# Altium PCB PCB_bp_rpi_lcnc-v0.355_2024-03-14.pcbdoc
Units mm, origin at the board's own origin, x right, y up, seen from the top; angles counter-clockwise.
Board outline 116.27 x 85.37 mm, 2 copper layers (Top Layer, Bottom Layer); 28 components, 92 nets, 233 pads, 17 vias.
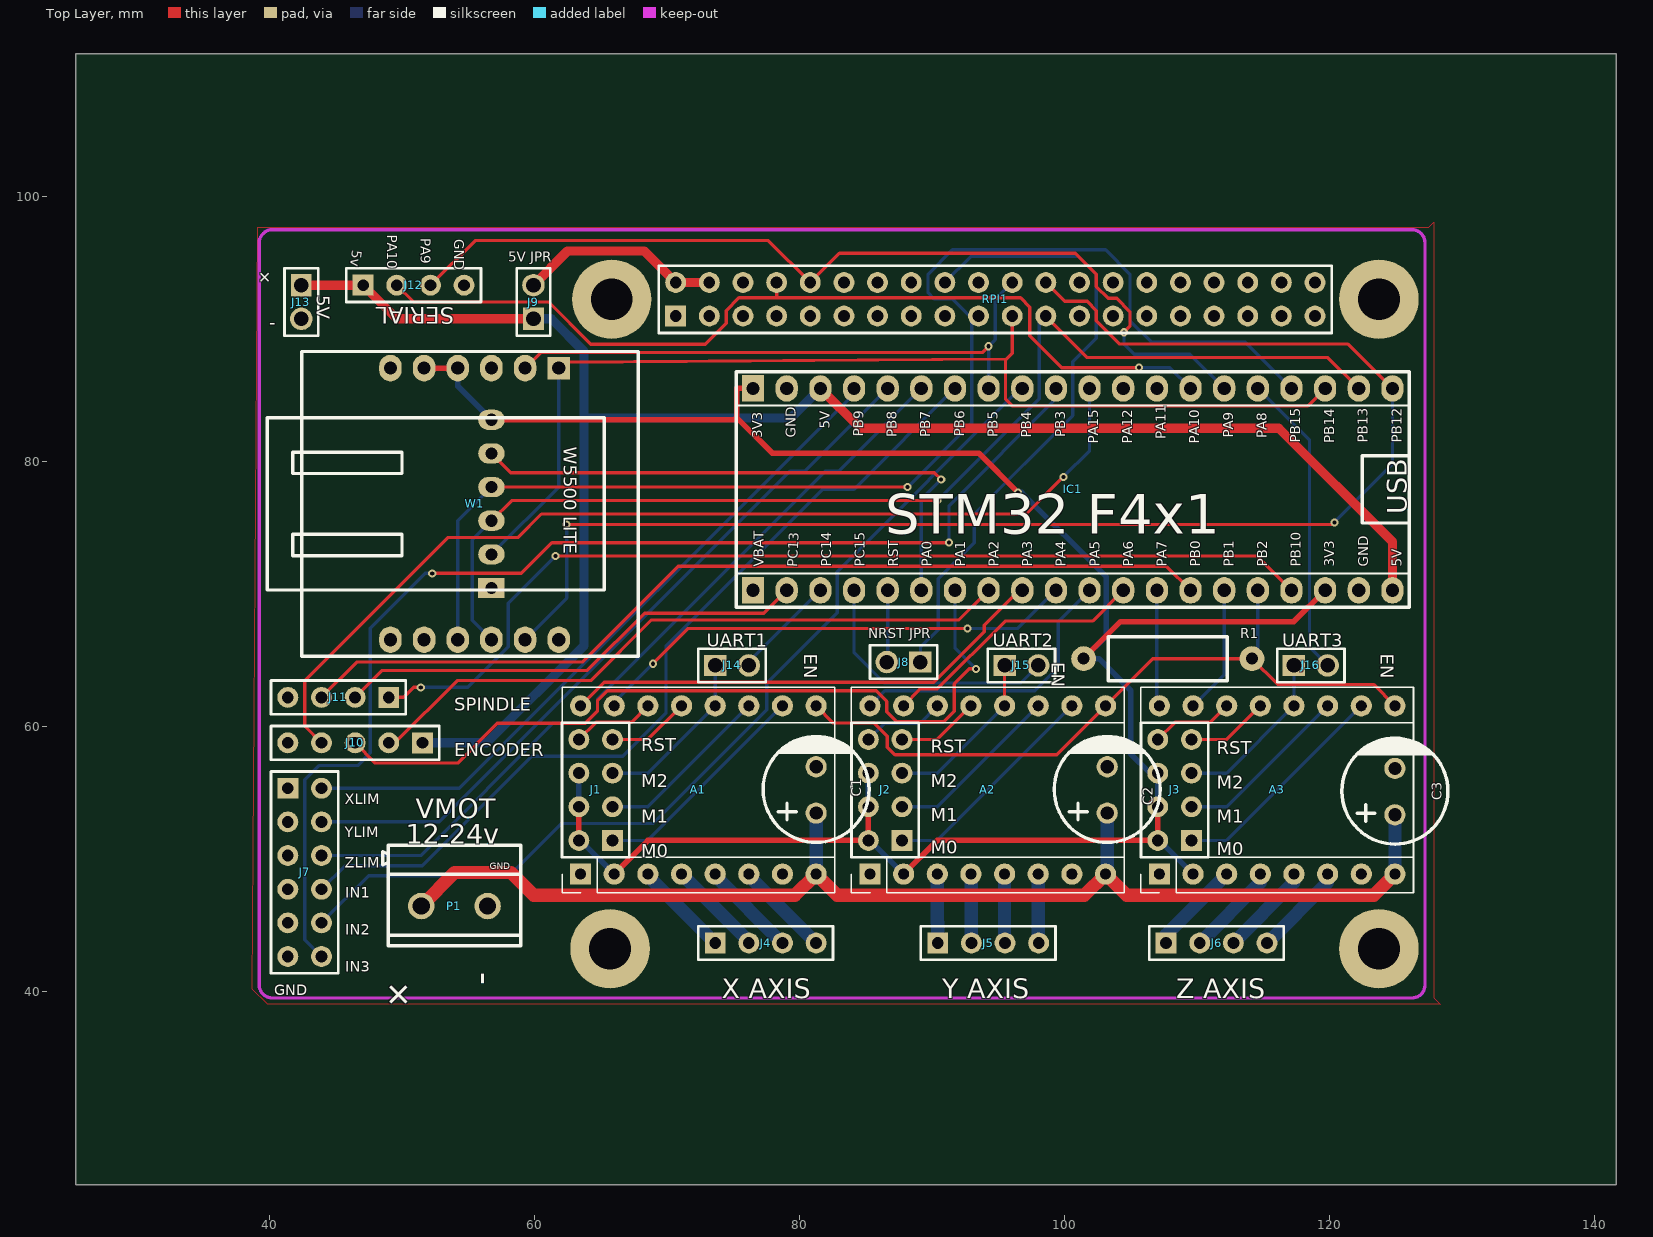
[diagram p0: Top Layer view]
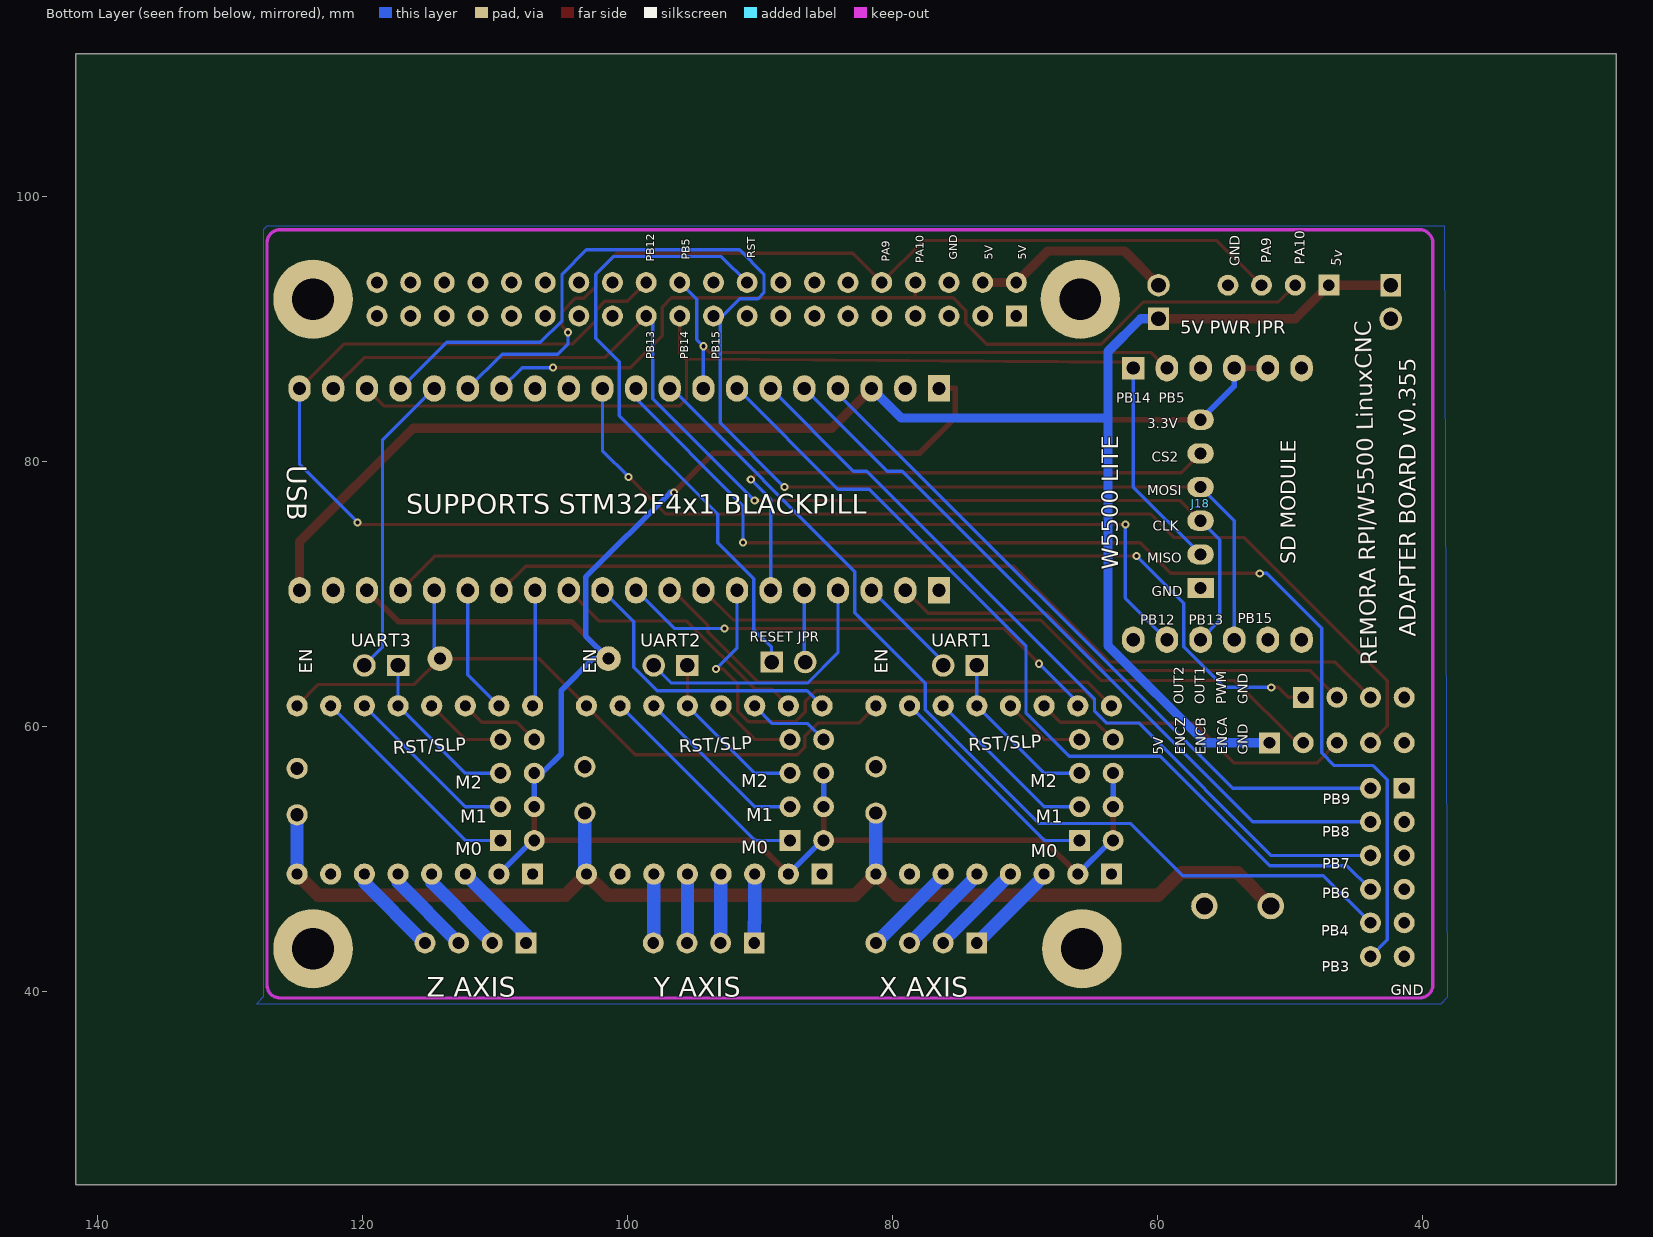
[diagram p1: Bottom Layer view, seen from below]

## Layer stack, top to bottom
Top Layer: signal copper (thickness not stored)
Dielectric: dielectric 0.32, FR-4, Dk 4.8
Bottom Layer: signal copper (thickness not stored)

## Board outline
141.668,25.4 25.4,25.4 25.4,110.771 141.668,110.771

## Components (designator, comment, footprint, x,y, rotation, side; value= is the part's Value field where it differs from the comment)
A1 "Pololu_Breakout_DRV8825" POLOLU_BREAKOUT-16_15.2X20.3MM 72.39,55.209 r90 top
A2 "Pololu_Breakout_DRV8825" POLOLU_BREAKOUT-16_15.2X20.3MM 94.234,55.209 r90 top
A3 "Pololu_Breakout_DRV8825" POLOLU_BREAKOUT-16_15.2X20.3MM 116.078,55.209 r90 top
C1 "100u" CAP-D8.0×F3.5 81.28,55.209 r90 top
C2 "100u" CAP-D8.0×F3.5 103.251,55.209 r90 top
C3 "100u" CAP-D8.0×F3.5 124.968,55.082 r90 top
IC1 "WEACT F411CE BLACK PILL" "BLACKPILL F411" 99.38,77.895 r270 top
J1 "HDR-M-2.54_2x4" HDR-M-2.54_2X4 64.643,55.209 r90 top
J2 "HDR-M-2.54_2x4" HDR-M-2.54_2X4 86.495,55.209 r90 top
J3 "HDR-M-2.54_2x4" HDR-M-2.54_2X4 108.339,55.209 r90 top
J4 "HDR-M-2.54_1x4" HDR-M-2.54_1X4 77.47,43.652 r0 top
J5 "HDR-M-2.54_1x4" HDR-M-2.54_1X4 94.267,43.652 r0 top
J6 "HDR-M-2.54_1x4" HDR-M-2.54_1X4 111.506,43.652 r0 top
J7 "HDR-M-2.54_2x6" HDR-M-2.54_2X6 42.672,48.986 r270 top
J8 "HDR-M-2.54_1x2" HDR-M-2.54_1X2 87.884,64.861 r180 top
J9 "HDR-M-2.54_1x2" HDR-M-2.54_1X2 59.944,92.039 r90 top
J10 "HDR-M-2.54_1x5" HDR-M-2.54_1X5 46.482,58.765 r180 top
J11 "HDR-M-2.54_1x4" HDR-M-2.54_1X4 45.212,62.194 r180 top
J12 "HDR-M-2.54_1x4" HDR-M-2.54_1X4 50.897,93.309 r0 top
J13 "HDR-M-2.54_1x2" HDR-M-2.54_1X2 42.418,92.039 r270 top
J14 "HDR-M-2.54_1x2" HDR-M-2.54_1X2 74.93,64.607 r0 top
J15 "HDR-M-2.54_1x2" HDR-M-2.54_1X2 96.774,64.607 r0 top
J16 "HDR-M-2.54_1x2" HDR-M-2.54_1X2 118.618,64.607 r0 top
J18 "MICRO SD CARD (MINIPCB) COPY" "MICRO SD CARD (MINIPCB)2" 56.769,76.799 r0 bottom
P1 "CONN-TH_2P-P5.00" CONN-TH_2P-P5.00 53.975,46.446 r0 top
R1 "10k" R_AXIAL-0.5 107.823,65.115 r0 top
RPI1 "RASPBERRY PI 4 B" HDR-20X2/2.54 94.808,92.246 r0 top
W1 "WIZNET5500" COMM-TH_W5500 55.499,76.799 r180 top

## Footprints (in the part's own frame and the unit in brackets; to place one, negate y for a bottom-side part, rotate by r counter-clockwise, add the part's x,y. Pads: shape width x height; smd on the part's side, far side on the other; paste and mask are expansions set on the pad)
"BLACKPILL F411" [mm]
  oval 2x1.676 hole 1 paste+0 mask+0.102: 3V3_1(7.62,20.32) 5V_1(7.62,25.4) 5V_2(-7.62,-17.78) GND_1(7.62,22.86) GND_3(-7.62,-20.32) PA0(7.62,-10.16) PA1(7.62,-7.62) PA2(7.62,-5.08) PA3(7.62,-2.54) PA4(7.62,0) PA5(7.62,2.54) PA6(7.62,5.08) PA7(7.62,7.62) PA8(-7.62,15.24) PA9(-7.62,12.7) PA10(-7.62,10.16) PA11(-7.62,7.62) PA12(-7.62,5.08) PA15(-7.62,2.54) PB0(7.62,10.16) PB1(7.62,12.7) PB2(7.62,15.24) PB3(-7.62,0) PB4(-7.62,-2.54) PB5(-7.62,-5.08) PB6(-7.62,-7.62) PB7(-7.62,-10.16) PB8(-7.62,-12.7) PB9(-7.62,-15.24) PB10(7.62,17.78) PB12(-7.62,25.4) PB13(-7.62,22.86) PB14(-7.62,20.32) PB15(-7.62,17.78) PC13(7.62,-20.32) PC14(7.62,-17.78) PC15(7.62,-15.24) RST(7.62,-12.7)
  rect 2x1.676 hole 1 paste+0 mask+0.102: 3V3_2(-7.62,-22.86)
  rect 2x1.676 hole 1.006 paste+0 mask+0.102: VBAT(7.62,-22.86)
  silkscreen extent -8.89,-24.13 8.89,26.67
CAP-D8.0×F3.5 [mm]
  round 1.6 hole 1 paste+0 mask+0.102: 1(-1.75,0) 2(1.75,0)
  silkscreen extent -3.96,-4 4.04,4
COMM-TH_W5500 [mm]
  rect 1.7x1.7 hole 1 paste+0 mask+0.051: 1(-6.35,-10.25)
  oval 1.7x2 hole 1 paste+0 mask+0.051: 2(-3.81,-10.25) 3(-1.27,-10.25) 4(1.27,-10.25) 5(3.81,-10.25) 6(6.35,-10.25) 7(6.35,10.25) 8(3.81,10.25) 9(1.27,10.25) 10(-1.27,10.25) 11(-3.81,10.25) 12(-6.35,10.25)
  silkscreen extent -12.35,-11.5 15.65,11.5
CONN-TH_2P-P5.00 [mm]
  round 2 hole 1.3 paste+0 mask+0.051: 1(-2.505,0) 2(2.504,0)
  silkscreen extent -5.4,-3 5,4.6
HDR-20X2/2.54 [mil]
  rect 62x62 hole 35 paste+0 mask+2: 1(-950,-50)
  round 62 hole 35 paste+0 mask+2: 2(-950,50) 3(-850,-50) 4(-850,50) 5(-750,-50) 6(-750,50) 7(-650,-50) 8(-650,50) 9(-550,-50) 10(-550,50) 11(-450,-50) 12(-450,50) 13(-350,-50) 14(-350,50) 15(-250,-50) 16(-250,50) 17(-150,-50) 18(-150,50) 19(-50,-50) 20(-50,50) 21(50,-50) 22(50,50) 23(150,-50) 24(150,50) 25(250,-50) 26(250,50) 27(350,-50) 28(350,50) 29(450,-50) 30(450,50) 31(550,-50) 32(550,50) 33(650,-50) 34(650,50) 35(750,-50) 36(750,50) 37(850,-50) 38(850,50) 39(950,-50) 40(950,50)
  silkscreen extent -1000,-100 1000,100
HDR-M-2.54_1X2 [mm]
  rect 1.7x1.575 hole 1.1 paste+0 mask+0.051: 1(-1.27,0)
  round 1.7 hole 1.1 paste+0 mask+0.051: 2(1.27,0)
  silkscreen extent -2.54,-1.27 2.54,1.27
HDR-M-2.54_1X4 [mil]
  rect 62x62 hole 35 paste+0 mask+2: 1(-150,0)
  round 62 hole 35 paste+0 mask+2: 2(-50,0) 3(50,0) 4(150,0)
  silkscreen extent -200,-50 200,50
HDR-M-2.54_1X5 [mil]
  rect 62x62 hole 35 paste+0 mask+2: 1(-200,0)
  round 62 hole 35 paste+0 mask+2: 2(-100,0) 3(0,0) 4(100,0) 5(200,0)
  silkscreen extent -250,-50 250,50
HDR-M-2.54_2X4 [mil]
  rect 62x62 hole 35 paste+0 mask+2: 1(-150,-50)
  round 62 hole 35 paste+0 mask+2: 2(-150,50) 3(-50,-50) 4(-50,50) 5(50,-50) 6(50,50) 7(150,-50) 8(150,50)
  silkscreen extent -200,-100 200,100
HDR-M-2.54_2X6 [mil]
  rect 62x62 hole 35 paste+0 mask+2: 1(-250,-50)
  round 62 hole 35 paste+0 mask+2: 2(-250,50) 3(-150,-50) 4(-150,50) 5(-50,-50) 6(-50,50) 7(50,-50) 8(50,50) 9(150,-50) 10(150,50) 11(250,-50) 12(250,50)
  silkscreen extent -300,-100 300,100
"MICRO SD CARD (MINIPCB)2" [mil]
  oval 78.74x60 hole 36 paste+0 mask+4: 1(0,-250) 2(0,-150) 3(0,-50) 4(0,50) 5(0,150)
  rect 78.74x60 hole 36 paste+0 mask+4: 6(0,250)
POLOLU_BREAKOUT-16_15.2X20.3MM [mm]
  rect 1.6x1.6 hole 0.8 slot 0.805 at 0 deg paste+0 mask+0.102: 1(-6.35,8.89)
  round 1.6 hole 0.8 slot 0.805 at 0 deg paste+0 mask+0.102: 2(-6.35,6.35) 3(-6.35,3.81) 4(-6.35,1.27) 5(-6.35,-1.27) 6(-6.35,-3.81) 7(-6.35,-6.35) 8(-6.35,-8.89) 9(6.35,-8.89) 10(6.35,-6.35) 11(6.35,-3.81) 12(6.35,-1.27) 13(6.35,1.27) 14(6.35,3.81) 15(6.35,6.35) 16(6.35,8.89)
  silkscreen extent -7.75,-10.29 7.75,10.29
R_AXIAL-0.5 [mil]
  round 74 hole 35.4 paste+0 mask+2: 1(-250,0) 2(250,0)
  silkscreen extent -177,-65 177,65

## Free pads (board coordinates)
  round 6 hole 3.15 paste+0 mask+0.051: 2(65.725,43.224) 2(65.852,92.246) 2(123.764,43.224) 2(123.764,92.246)

## Via types
v1: diameter 0.61, hole 0.305, Top Layer to Bottom Layer, tented both sides, 17 vias

## Nets (pads, with @x,y where several pads share a name; then routed paths per layer and width w, separated by ;. In a path a pad name is that pad's centre, name@x,y a point inside that pad or via, vN(x,y) a via of type N, cw(c..) or ccw(c..) an arc to the next point about the centre after c; other vN are vias at no path point)
+3.3V: A1.2 A2.2 A3.2 IC1.3V3_1 IC1.3V3_2 J1.2 J1.4 J1.6 J2.2 J2.4 J2.6 J3.2 J3.4 J3.6 J18.1 R1.1 W1.4 W1.5 | length 168.5
  Top Layer w0.42: W1.5 W1.4 ; J18.1 75.095,83.149 75.272,83.325 ; J1.2 J1.4 ; A1.2 68.58,51.399 J2.2 J2.4 ; IC1.3V3_2 75.272,85.515 75.272,83.325 ; A2.2 90.424,51.399 J3.2 J3.4 ; v1(96.516,77.669) 93.563,80.622 77.975,80.622 75.272,83.325 ; R1.1 104.268,67.91 117.334,67.91 IC1.3V3_1
  Bottom Layer w0.42: W1.4 54.229,85.689 J18.1 ; J1.2 63.5,51.399 A1.2 ; J1.4 J1.6 ; J2.2 85.344,51.399 A2.2 ; J2.4 J2.6 ; v1(96.516,77.669) 96.794,77.668 103.19,71.272 103.19,66.832 R1.1 102.616,65.115 105.029,62.702 105.029,57.927 106.477,56.479 J3.6 J3.4 ; J3.2 107.188,51.399 A3.2
+5V: IC1.5V_1 IC1.5V_2 J9.1 J10.1 J12.1 J13.1 | length 134.8
  Top Layer w0.7: J13.1 43.756,93.309 J12.1 49.627,90.769 J9.1 ; IC1.5V_2@81.6,85.516 84.602,82.514 116.205,82.514 124.78,73.939 IC1.5V_1@124.78,70.276
  Bottom Layer w0.7: J10.1 56.424,58.765 63.754,66.095 63.754,86.832 ; J9.1 61.282,90.769 ; 61.283,90.769 63.754,88.298 63.754,86.832 ; IC1.5V_2@81.6,85.516 79.36,83.276 63.754,83.276 63.754,86.832
A1_10: A1.10 J1.1 | length 17
  Bottom Layer w0.25: J1.1 68.58,51.399 A1.10
A1_11: A1.11 J1.3 | length 13.4
  Bottom Layer w0.25: J1.3 68.58,53.939 A1.11
A1_12: A1.12 J1.5 J14.1 | length 12.9
  Bottom Layer w0.25: J1.5 68.58,56.479 A1.12 J14.1
A2_10: A2.10 J2.1 | length 17
  Bottom Layer w0.25: J2.1 90.424,51.399 A2.10
A2_11: A2.11 J2.3 | length 13.4
  Bottom Layer w0.25: J2.3 90.424,53.939 A2.11
A2_12: A2.12 J2.5 J15.1 | length 12.9
  Top Layer w0.25: A2.12 J15.1
  Bottom Layer w0.25: J2.5 90.424,56.479 A2.12
A3_10: A3.10 J3.1 | length 17
  Bottom Layer w0.25: J3.1 112.268,51.399 A3.10
A3_11: A3.11 J3.3 | length 13.4
  Bottom Layer w0.25: J3.3 112.268,53.939 A3.11
A3_12: A3.12 J3.5 J16.1 | length 12.9
  Bottom Layer w0.25: J3.5 112.268,56.479 A3.12 J16.1
CS: IC1.PB12 RPI1.24 W1.11 | length 109.9
  Top Layer w0.25: v1(62.451,75.239) 120.233,75.239 v1(120.396,75.402) ; RPI1.24 100.043,92.09 101.735,92.09 102.428,91.396 102.428,90.629 104.193,88.864 121.432,88.864 IC1.PB12@124.78,85.516
  Bottom Layer w0.25: W1.11 62.451,69.691 v1(62.451,75.239) ; v1(120.396,75.402) 124.78,79.786 IC1.PB12
CS2: IC1.PA0 J18.2 | length 43.8
  Top Layer w0.25: J18.2 58.22,79.158 90.209,79.158 v1(90.722,78.645)
  Bottom Layer w0.25: IC1.PA0 89.22,77.144 v1(90.722,78.645)
EN_STEP: A1.9 A2.9 A3.9 IC1.PB2 R1.2 | length 55.5
  Top Layer w0.25: A1.9 82.58,60.259 85.66,60.259 86.651,59.268 86.651,58.442 87.226,57.867 99.432,57.867 A2.9 106.68,65.115 R1.2 116.114,63.174 123.353,63.174 A3.9
  Bottom Layer w0.25: R1.2 114.62,65.562 IC1.PB2
GND: A1.1 A1.7 A2.1 A2.7 A3.1 A3.7 C1.2 C2.2 C3.2 IC1.GND_1 IC1.GND_3 J7.1 J7.3 J7.5 J7.7 J7.9 J7.11 J10.5 J11.4 J12.4 J13.2 J18.6 P1.2 RPI1.6 RPI1.9 RPI1.14 RPI1.20 RPI1.25 RPI1.30 RPI1.34 RPI1.39 W1.6 W1.7 W1.8
IC1_PA11: IC1.PA11
IC1_PA12: IC1.PA12
IC1_VBAT: IC1.VBAT
IN1: IC1.PB6 J7.8 | length 66.4
  Bottom Layer w0.25: J7.8 45.72,49.494 51.562,49.494 59.817,57.749 66.675,57.749 69.952,61.026 69.952,66.083 81.763,77.896 84.14,77.896 IC1.PB6@91.76,85.516
IN2: IC1.PB4 J7.10 | length 72.6
  Bottom Layer w0.25: J7.10 47.498,48.732 58.102,48.732 62.039,52.669 68.953,52.669 77.554,61.269 77.554,63.263 82.87,68.58 82.87,71.686 96.698,85.516 IC1.PB4@96.84,85.516
IN3: IC1.PB3 J7.12 | length 90.4
  Top Layer w0.25: v1(52.304,71.559) 59.022,71.559 61.341,73.878 v1(91.313,73.878)
  Bottom Layer w0.25: J7.12 42.672,43.906 42.672,55.971 43.752,57.05 46.672,57.05 47.633,58.011 47.633,67.409 51.783,71.559 v1(52.304,71.559) ; v1(91.313,73.878) 91.313,76.672 99.38,84.739 IC1.PB3@99.38,85.516
MISO: IC1.PB14 J18.5 RPI1.21 W1.1 | length 81.3
  Top Layer w0.25: W1.1@61.88,87.486 95.648,87.738 ; RPI1.21 96.078,88.168 95.57,87.66 95.57,87.048 95.57,84.734 96.116,84.188 118.374,84.188 IC1.PB14@119.7,85.516
  Bottom Layer w0.25: J18.5 61.849,78.069 W1.1
MOSI: IC1.PB15 J18.3 RPI1.19 W1.9 | length 99.7
  Top Layer w0.25: J18.3 v1(88.187,78.069)
  Bottom Layer w0.25: W1.9 54.229,75.529 J18.3 ; v1(88.187,78.069) 93.03,82.912 93.03,90.334 93.03,90.468 RPI1.19 ; 93.03,90.335 93.03,90.83 91.567,92.293 90.17,92.293 89.728,92.735 89.728,94.137 91.567,95.976 103.124,95.976 104.968,94.132 104.968,90.634 106.609,88.991 113.685,88.991 IC1.PB15@117.16,85.516
N$110714: 
NRST_BLACK: IC1.RST J8.2 | length 5.4
  Bottom Layer w0.25: J8.2 86.68,64.927 IC1.RST
OUT1: IC1.PC13 J11.2 | length 35.9
  Top Layer w0.25: J11.2 48.514,64.226 64.008,64.226 68.326,68.544 77.328,68.544 IC1.PC13@79.06,70.276
OUT2: IC1.PB10 J11.1 | length 75.6
  Top Layer w0.25: J11.1 50.135,62.194 50.897,62.956 v1(51.435,62.956) ; v1(61.595,72.862) 114.573,72.862 IC1.PB10
  Bottom Layer w0.25: v1(51.435,62.956) 54.993,62.956 58.039,66.002 58.039,69.306 v1(61.595,72.862)
PRU_RESET: IC1.PB5 RPI1.22 W1.2 | length 44.4
  Top Layer w0.25: W1.2 60.486,88.226 93.826,88.226 v1(94.3,88.699)
  Bottom Layer w0.25: IC1.PB5 v1(94.3,88.699) 94.808,89.207 94.808,92.246 RPI1.22
PWM: IC1.PB0 J11.3 | length 70.5
  Top Layer w0.25: J11.3 46.609,64.861 63.627,64.861 70.866,72.1 107.716,72.1 IC1.PB0@109.54,70.276
QEI_CHA: IC1.PA15 J10.4 | length 76.4
  Top Layer w0.25: J10.4 42.672,60.035 42.672,63.464 53.467,74.259 58.768,74.259 60.546,76.037 97.155,76.037 v1(99.949,78.831)
  Bottom Layer w0.25: v1(99.949,78.831) 101.92,80.802 IC1.PA15
QEI_CHB: IC1.PA1 J10.3 | length 61.1
  Top Layer w0.25: J10.3 48.006,57.241 54.224,57.241 57.221,60.238 63.863,60.238 64.77,61.145 64.77,61.93 65.527,62.687 85.816,62.687 86.614,61.887 86.614,61.109 87.361,60.36 90.899,60.36 91.694,61.155 91.694,63.21 92.837,64.353 v1(93.345,64.353)
  Bottom Layer w0.25: IC1.PA1 91.76,65.938 v1(93.345,64.353)
QEI_CHZ: IC1.PA2 J10.2 | length 50
  Top Layer w0.25: J10.2 49.484,58.765 54.183,63.464 64.262,63.464 68.834,68.036 92.06,68.036 IC1.PA2@94.3,70.276
RPI1_1: RPI1.1
RPI1_3: RPI1.3
RPI1_5: RPI1.5
RPI1_7: RPI1.7
RPI1_11: RPI1.11
RPI1_12: RPI1.12
RPI1_13: RPI1.13
RPI1_15: RPI1.15
RPI1_16: RPI1.16
RPI1_17: RPI1.17
RPI1_26: RPI1.26
RPI1_27: RPI1.27
RPI1_28: RPI1.28
RPI1_29: RPI1.29
RPI1_31: RPI1.31
RPI1_32: RPI1.32
RPI1_33: RPI1.33
RPI1_35: RPI1.35
RPI1_36: RPI1.36
RPI1_37: RPI1.37
RPI1_38: RPI1.38
RPI1_40: RPI1.40
SCK: IC1.PB13 J18.4 RPI1.23 W1.10 | length 87.7
  Top Layer w0.25: J18.4 58.293,77.053 v1(90.424,77.053) ; RPI1.23 101.745,87.848 119.908,87.848 IC1.PB13@122.24,85.516
  Bottom Layer w0.25: W1.10 55.318,68 55.318,74.078 J18.4 ; v1(90.424,77.053) 98.11,84.739 98.11,90.468 RPI1.23
STM32_RESET: J8.1 RPI1.18 | length 47.6
  Bottom Layer w0.25: J8.1 89.154,65.974 90.49,67.31 90.49,71.15 93.218,73.878 93.218,76.037 100.65,83.469 100.65,87.533 102.428,89.311 102.428,94.132 101.092,95.468 92.949,95.468 RPI1.18
STM_5V: J9.2 RPI1.2 RPI1.4 | length 15.3
  Top Layer w0.7: J9.2 62.518,95.883 68.311,95.883 RPI1.2 RPI1.4
STM_RX: IC1.PA10 J12.2 RPI1.8 | length 69
  Top Layer w0.25: J12.2 50.897,92.039 61.087,92.039 64.272,88.854 72.908,88.854 74.488,90.434 74.488,91.396 75.451,92.359 78.298,92.359 ; RPI1.8 78.298,92.359 96.708,92.359 97.409,91.658 97.409,89.499 99.822,87.086 v1(105.664,87.086)
  Bottom Layer w0.25: v1(105.664,87.086) 107.969,87.086 IC1.PA10
STM_TX: IC1.PA9 J12.3 RPI1.10 | length 70.4
  Top Layer w0.25: J12.3 55.533,96.675 77.679,96.675 RPI1.10 ; RPI1.10 83.043,95.722 100.835,95.722 102.428,94.132 102.428,93.205 103.314,92.316 103.97,92.316 104.968,91.318 104.968,90.2 v1(104.521,89.753)
  Bottom Layer w0.25: v1(104.521,89.753) 104.521,88.864 105.283,88.102 109.494,88.102 IC1.PA9@112.08,85.516
VCC: A1.8 A2.8 A3.8 C1.1 C2.1 C3.1 P1.1 | length 92.3
  Top Layer w1: P1.1 54.011,48.986 58.237,48.986 59.967,47.259 79.68,47.259 A1.8 82.881,47.258 101.523,47.258 A2.8 104.725,47.258 123.367,47.258 A3.8
  Bottom Layer w1: A1.8 C1.1 ; A2.8 103.251,48.986 C2.1 ; A3.8 C3.1
W1_3: W1.3
W1_12: W1.12
XA1: A1.5 J4.3 | length 7.3
  Bottom Layer w1: A1.5 73.66,48.732 J4.3
XA2: A1.6 J4.4 | length 7.3
  Bottom Layer w1: A1.6 76.2,48.732 J4.4
XB1: A1.4 J4.2 | length 7.3
  Bottom Layer w1: A1.4 76.2,43.779 J4.2
XB2: A1.3 J4.1 | length 7.3
  Bottom Layer w1: A1.3 68.58,48.732 J4.1
XDIR: A1.16 IC1.PA3 | length 37.2
  Top Layer w0.25: A1.16 65.278,63.337 90.17,63.337 93.98,67.147 93.98,67.655 96.601,70.276 IC1.PA3@96.84,70.276
XLIMIT: IC1.PB9 J7.2 | length 52.9
  Bottom Layer w0.25: J7.2 54.356,55.336 84.14,85.12 IC1.PB9@84.14,85.516
XM2: IC1.PC14 J14.2 | length 7.9
  Bottom Layer w0.25: J14.2 76.2,64.875 IC1.PC14
XRST: A1.13 J1.7 | length 6.3
  Top Layer w0.25: J1.7 68.58,59.019 A1.13
XSLP: A1.14 J1.8 | length 6.3
  Top Layer w0.25: J1.8 64.679,60.325 67.346,60.325 A1.14
XSTEP: A1.15 IC1.PA4 | length 37.1
  Top Layer w0.25: v1(68.961,64.734) 71.628,67.401 v1(92.71,67.401)
  Bottom Layer w0.25: A1.15 66.04,61.813 v1(68.961,64.734) ; v1(92.71,67.401) 96.506,67.401 IC1.PA4
YA1: A2.5 J5.3 | length 5.2
  Bottom Layer w1: A2.5 95.504,43.685 J5.3
YA2: A2.6 J5.4 | length 5.2
  Bottom Layer w1: A2.6 98.044,43.685 J5.4
YB1: A2.4 J5.2 | length 5.2
  Bottom Layer w1: A2.4 92.997,48.826 J5.2
YB2: A2.3 J5.1 | length 5.2
  Bottom Layer w1: A2.3 90.424,45.223 90.457,45.19 J5.1
YDIR: A2.16 IC1.PA5 | length 22.2
  Bottom Layer w0.25: A2.16 86.471,62.686 97.787,62.686 99.554,64.453 99.554,67.909 IC1.PA5
YLIMIT: IC1.PB8 J7.4 | length 56.3
  Bottom Layer w0.25: J7.4 52.832,52.796 79.306,79.27 80.434,79.27 IC1.PB8@86.68,85.516
YM2: IC1.PC15 J15.2 | length 20.1
  Bottom Layer w0.25: IC1.PC15 84.14,65.557 86.417,63.28 96.717,63.28 J15.2
YRST: A2.13 J2.7 | length 6.3
  Top Layer w0.25: J2.7 90.424,59.019 A2.13
YSLP: A2.14 J2.8 | length 6.3
  Bottom Layer w0.25: J2.8 86.426,60.22 89.085,60.22 A2.14
YSTEP: A2.15 IC1.PA6 | length 20.2
  Top Layer w0.25: A2.15 89.154,62.829 90.424,62.829 95.555,67.96 102.146,67.96 IC1.PA6@104.46,70.276
ZA1: A3.5 J6.3 | length 7.1
  Bottom Layer w1: J6.3 117.348,48.224 A3.5
ZA2: A3.6 J6.4 | length 7.1
  Bottom Layer w1: J6.4 119.888,48.224 A3.6
ZB1: A3.4 J6.2 | length 7.1
  Bottom Layer w1: J6.2 114.808,48.224 A3.4
ZB2: A3.3 J6.1 | length 7.1
  Bottom Layer w1: J6.1 107.696,44.287 A3.3
ZDIR: A3.16 IC1.PA7 | length 8.8
  Bottom Layer w0.25: IC1.PA7 107,61.747 A3.16
ZLIMIT: IC1.PB7 J7.6 | length 60.4
  Bottom Layer w0.25: J7.6 51.435,50.256 61.445,60.266 63.884,60.266 64.77,61.153 64.77,62.062 81.978,79.27 82.974,79.27 IC1.PB7@89.22,85.516
ZM2: IC1.PA8 J16.2 | length 23.1
  Bottom Layer w0.25: IC1.PA8 118.525,81.611 118.525,65.97 J16.2
ZRST: A3.13 J3.7 | length 6.3
  Top Layer w0.25: J3.7 112.268,59.019 A3.13
ZSLP: A3.14 J3.8 | length 6.3
  Top Layer w0.25: J3.8 108.373,60.323 111.032,60.323 A3.14
ZSTEP: A3.15 IC1.PB1 | length 9.7
  Bottom Layer w0.25: A3.15 112.08,63.911 IC1.PB1

## Polygon pours and split planes (outlines as drawn)
GND on Bottom Layer (solid): 38.354,97.754 127.254,97.754 127.508,97.5 127.508,39.588 128.016,39.08 38.608,39.08 38.1,39.588
GND on Top Layer (solid): 39.116,97.69 127.508,97.69 127.889,98.071 127.889,39.524 128.397,39.016 39.878,39.016 38.735,40.159

## Keep-outs
Keep-Out Layer:
  lines w0.254: 39.243,40.5 ccw(c40.243,40.5) 40.243,39.5 ; 39.243,96.5 cw(c40.243,96.5) 40.243,97.5 ; 126.243,39.5 ccw(c126.243,40.5) 127.243,40.5 ; 126.243,97.5 cw(c126.243,96.5) 127.243,96.5

## Silkscreen, mask and mechanical layers (free items; w line width, h text height)
Top Overlay:
  text "PA10" at 48.901,97.119 h0.75 r270
  text "PA9" at 51.441,96.865 h0.75 r270
  text "GND" at 53.949,96.786 h0.75 r270
  text "5v" at 46.269,95.981 h0.75 r263
  text "5V JPR" at 58.039,95.093 h0.75
  text "+" at 40.359,93.79 h1 r135
  text "5V" at 43.569,92.547 h1 r270
  text "SERIAL" at 53.975,91.648 h1.25 r180
  text "-" at 40.005,90.015 h1
  text "W5500 LITE" at 62.238,81.117 h1 r270
  text "USB" at 125.845,76.037 h1.5 r90
  text "NRST JPR" at 85.217,66.645 h0.75
  text "UART1" at 73.025,66.012 h1
  text "UART2" at 94.615,66.012 h1
  text "UART3" at 116.459,66.012 h1
  text "EN" at 80.399,65.496 h1 r270
  text "EN" at 123.899,65.496 h1 r270
  text "EN" at 99.068,64.861 h1 r270
  text "SPINDLE" at 53.975,61.186 h1
  text "RST" at 68.072,58.138 h1
  text "RST" at 89.916,58.011 h1
  text "RST" at 111.506,57.884 h1
  text "ENCODER" at 53.975,57.757 h1
  text "M2" at 68.072,55.429 h1
  text "M2" at 89.916,55.429 h1
  text "M2" at 111.506,55.301 h1
  text "XLIM" at 45.695,54.111 h0.8
  text "VMOT" at 51.054,53.062 h1.5
  text "M1" at 89.916,52.846 h1
  text "M1" at 68.072,52.719 h1
  text "M1" at 111.506,52.719 h1
  text "YLIM" at 45.695,51.634 h0.8
  text "12-24v" at 50.292,51.157 h1.5
  text "M0" at 89.916,50.391 h1
  text "M0" at 111.506,50.264 h1
  text "M0" at 68.072,50.137 h1
  text "ZLIM" at 45.695,49.348 h0.8
  text "GND" at 56.642,49.24 h0.51
  text "IN1" at 45.72,47.062 h0.8
  text "IN2" at 45.72,44.268 h0.8
  text "IN3" at 45.72,41.474 h0.8
  text "+" at 49.966,41.184 h2 r225
  text "-" at 56.88,40.477 h2 r90
  text "GND" at 40.386,39.696 h0.8
  text "X AXIS" at 74.168,39.473 h1.5
  text "Y AXIS" at 90.805,39.474 h1.5
  text "Z AXIS" at 108.458,39.473 h1.5
Bottom Overlay:
  text "RST" at 90.378,95.341 h0.6 r270
  text "5V" at 69.931,95.214 h0.6 r270
  text "5V" at 72.471,95.214 h0.6 r270
  text "GND" at 75.138,95.214 h0.6 r270
  text "PB5" at 95.331,95.214 h0.6 r270
  text "PA9" at 80.218,95.087 h0.6 r270
  text "PB12" at 97.998,95.087 h0.6 r270
  text "PA9" at 51.441,94.96 h0.75 r270
  text "PA10" at 77.678,94.96 h0.6 r270
  text "PA10" at 48.901,94.833 h0.75 r270
  text "GND" at 53.822,94.754 h0.75 r270
  text "5v" at 46.205,94.709 h0.75 r277
  text "5V PWR JPR" at 58.293,89.634 h1
  text "PB15" at 93.045,87.721 h0.6 r270
  text "PB14" at 95.458,87.721 h0.6 r270
  text "PB13" at 97.998,87.721 h0.6 r270
  text "PB5" at 59.944,84.425 h0.75
  text "PB14" at 63.119,84.425 h0.75
  text "USB" at 125.718,79.72 h1.5 r90
  text "SUPPORTS STM32F4x1 BLACKPILL" at 116.713,76.049 h1.5
  text "SD MODULE" at 49.603,72.227 h1.12 r270
  text "W5500 LITE" at 63.002,71.846 h1.25 r270
  text "PB15" at 53.975,67.788 h0.75
  text "PB13" at 57.658,67.661 h0.75
  text "PB12" at 61.341,67.661 h0.75
  text "ADAPTER BOARD v0.355" at 40.523,66.766 h1.25 r270
  text "RESET JPR" at 90.805,66.391 h0.75
  text "UART1" at 77.089,66.012 h1
  text "UART2" at 99.06,66.012 h1
  text "UART3" at 120.904,66.012 h1
  text "REMORA RPI/W5500 LinuxCNC" at 43.444,64.618 h1.25 r269
  text "EN" at 80.399,63.972 h1 r270
  text "EN" at 102.37,63.972 h1 r270
  text "EN" at 123.833,63.972 h1 r270
  text "GND" at 53.219,61.686 h0.75 r270
  text "PWM" at 54.828,61.686 h0.75 r270
  text "OUT1" at 56.436,61.686 h0.75 r270
  text "OUT2" at 58.045,61.686 h0.75 r270
  text "RST/SLP" at 74.269,58.139 h1 r357
  text "RST/SLP" at 96.113,58.012 h1 r357
  text "GND" at 53.219,57.877 h0.75 r270
  text "ENCA" at 54.743,57.876 h0.75 r270
  text "ENCB" at 56.394,57.876 h0.75 r270
  text "ENCZ" at 57.918,57.876 h0.75 r270
  text "5V" at 59.569,57.876 h0.75 r270
  text "RST/SLP" at 117.703,57.885 h1 r357
  text "M2" at 69.613,55.429 h1
  text "M2" at 91.457,55.429 h1
  text "M2" at 113.047,55.301 h1
  text "PB9" at 47.564,54.111 h0.8
  text "M1" at 91.048,52.846 h1
  text "M1" at 69.204,52.719 h1
  text "M1" at 112.638,52.719 h1
  text "PB8" at 47.6,51.659 h0.8
  text "M0" at 91.44,50.391 h1
  text "M0" at 113.047,50.264 h1
  text "M0" at 69.596,50.137 h1
  text "PB7" at 47.6,49.272 h0.8
  text "PB6" at 47.589,47.037 h0.8
  text "PB4" at 47.661,44.217 h0.8
  text "PB3" at 47.625,41.474 h0.8
  text "GND" at 42.418,39.696 h0.8
  text "X AXIS" at 81.026,39.6 h1.5
  text "Y AXIS" at 98.044,39.6 h1.5
  text "Z AXIS" at 115.189,39.6 h1.5

## Text inside footprints (layer, text, board x,y; h text height)
A1: Document "REF" at 71.747,54.066 h1 r90
A2: Document "REF" at 91.813,54.32 h1 r90
A3: Document "REF" at 114.8,54.32 h1 r90
IC1: Top Overlay "VBAT" at 77.337,72.053 h0.75 r90; Top Overlay "PC13" at 79.87,72.034 h0.75 r87; Top Overlay "PC14" at 82.404,72.053 h0.75 r90; Top Overlay "PC15" at 84.937,72.053 h0.75 r90; Top Overlay "RST" at 87.47,72.053 h0.75 r90; Top Overlay "PA0" at 90.003,72.053 h0.75 r90; Top Overlay "PA1" at 92.537,72.053 h0.75 r90; Top Overlay "PA2" at 95.07,72.053 h0.75 r90; Top Overlay "PA3" at 97.603,72.053 h0.75 r90; Top Overlay "PA4" at 100.137,72.053 h0.75 r90; Top Overlay "PA5" at 102.67,72.053 h0.75 r90; Top Overlay "PA6" at 105.204,72.053 h0.75 r90; Top Overlay "PA7" at 107.737,72.053 h0.75 r90; Top Overlay "PB0" at 110.27,72.053 h0.75 r90; Top Overlay "PB1" at 112.804,72.053 h0.75 r90; Top Overlay "PB2" at 115.337,72.053 h0.75 r90; Top Overlay "PB10" at 117.87,72.053 h0.75 r90; Top Overlay "3V3" at 120.403,72.053 h0.75 r90; Top Overlay "GND" at 122.937,72.053 h0.75 r90; Top Overlay "5V" at 125.47,72.053 h0.75 r90; Top Overlay "GND" at 79.75,81.787 h0.75 r90; Top Overlay "5V" at 82.29,82.456 h0.75 r90; Top Overlay "3V3" at 77.21,81.752 h0.75 r90; Top Overlay "PB12" at 125.47,81.424 h0.75 r90; Top Overlay "PB13" at 122.912,81.424 h0.75 r90; Top Overlay "PB14" at 120.372,81.391 h0.75 r90; Top Overlay "PB15" at 117.832,81.424 h0.75 r90; Top Overlay "PA8" at 115.292,81.752 h0.75 r90; Top Overlay "PA9" at 112.752,81.787 h0.75 r90; Top Overlay "PA10" at 110.212,81.358 h0.75 r90; Top Overlay "PA11" at 107.672,81.663 h0.75 r90; Top Overlay "PA12" at 105.132,81.358 h0.75 r90; Top Overlay "PA15" at 102.592,81.358 h0.75 r90; Top Overlay "PB4" at 97.53,81.787 h0.75 r90; Top Overlay "PB5" at 94.99,81.82 h0.75 r90; Top Overlay "PB6" at 92.45,81.849 h0.75 r89; Top Overlay "PB7" at 89.91,81.82 h0.75 r90; Top Overlay "PB8" at 87.37,81.82 h0.75 r90; Top Overlay "PB9" at 84.83,81.849 h0.75 r89; Top Overlay "PB3" at 100.07,81.82 h0.75 r90; Top Overlay "STM32 F4x1" at 86.487,74.537 h3
J18: Bottom Overlay "GND" at 60.452,69.82 h0.75; Bottom Overlay "MISO" at 60.779,72.36 h0.75; Bottom Overlay "CLK" at 60.384,74.773 h0.75; Bottom Overlay "MOSI" at 60.779,77.44 h0.75; Bottom Overlay "CS2" at 60.452,79.98 h0.75; Bottom Overlay "3.3V" at 60.779,82.52 h0.75